# Altium PCB EP3C25.PcbDoc (part 3 of 4)
Units mil, origin at the board's own origin, x right, y up, seen from the top; angles counter-clockwise.
Board outline 6000 x 4000 mil, 2 copper layers (Top Layer, Bottom Layer); 113 components, 182 nets, 855 pads, 215 vias.
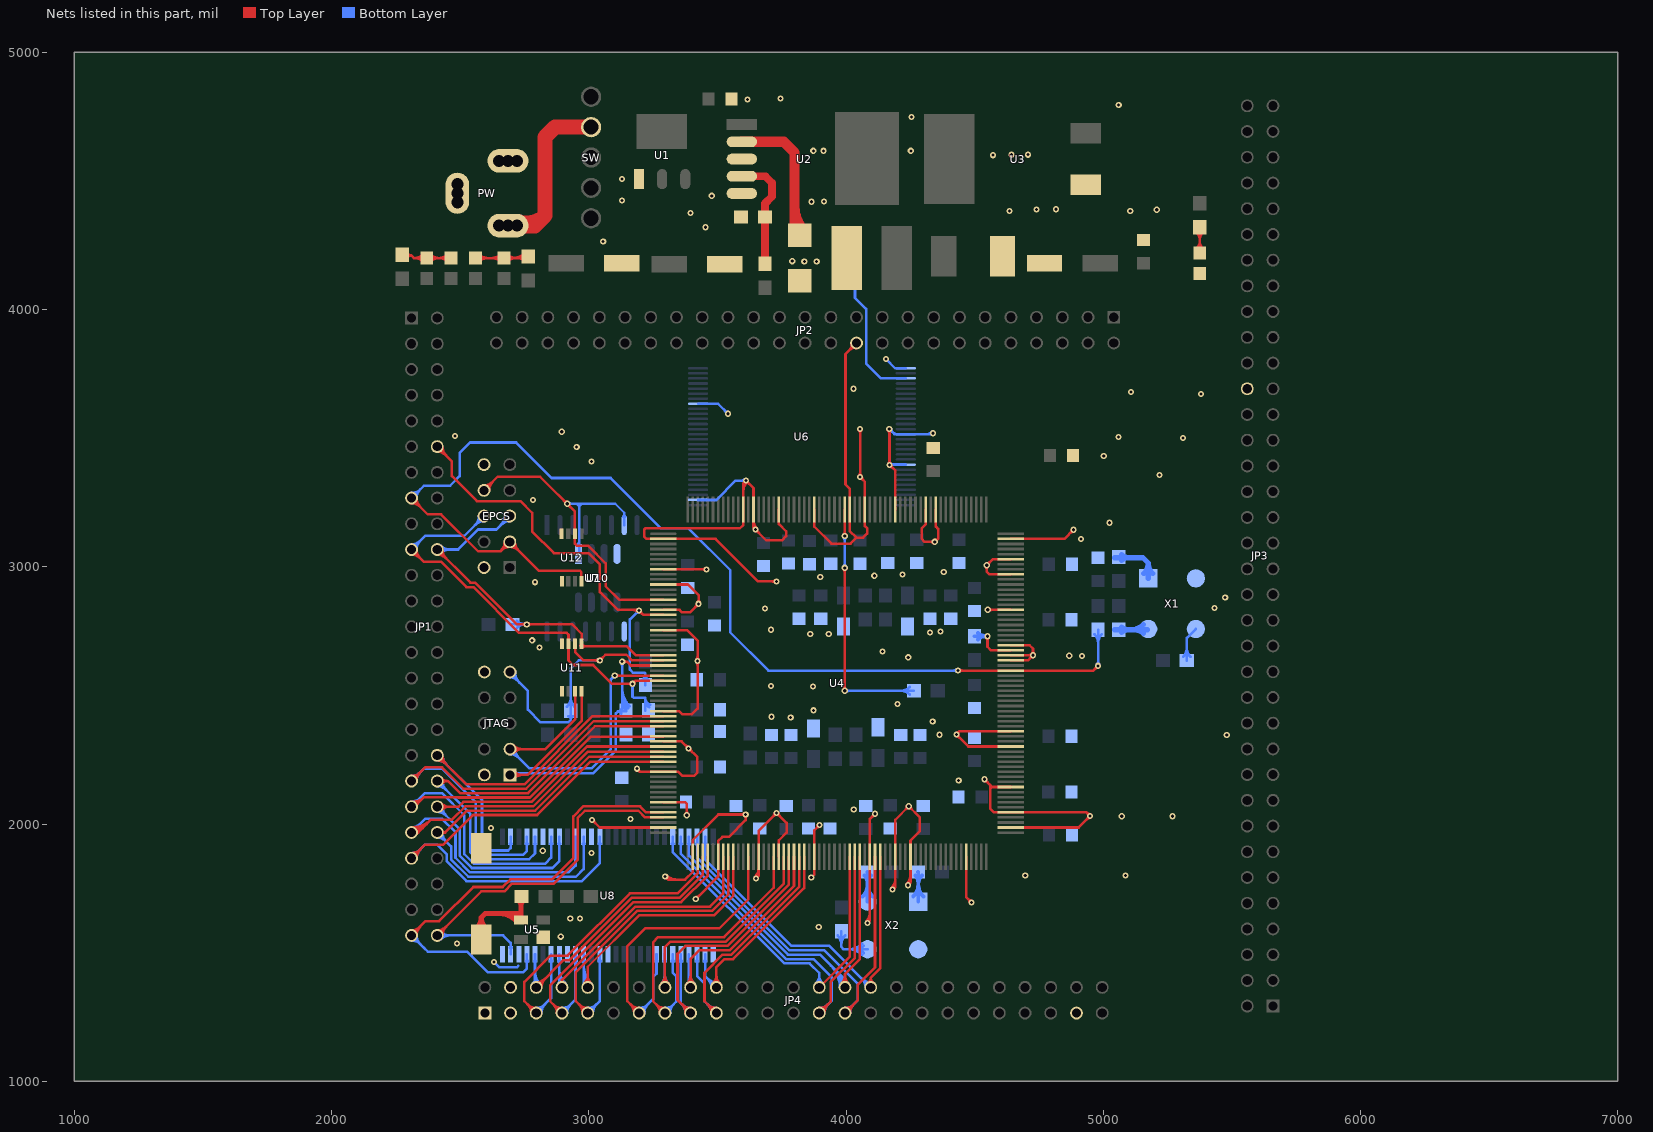
[diagram p3: the nets of this part, all layers, seen from the top]

## Via types
v1: diameter 24, hole 12, Top Layer to Bottom Layer, 205 vias
v2: diameter 40, hole 20, Top Layer to Bottom Layer, 6 vias
v3: diameter 250, hole 130, Top Layer to Bottom Layer, 3 vias
v4: diameter 250, hole 150, Top Layer to Bottom Layer, 1 vias

## Nets (pads, with @x,y where several pads share a name; then routed paths per layer and width w, separated by ;. In a path a pad name is that pad's centre, name@x,y a point inside that pad or via, vN(x,y) a via of type N, cw(c..) or ccw(c..) an arc to the next point about the centre after c; other vN are vias at no path point) (continued)
GND: C1.1 C2.1 C3.2 C4.2 C5.2 C6.2 C7.1 C8.1 C9.1 C10.1 C11.1 C12.1 C13.1 C14.1 C15.1 C16.1 C17.1 C18.1 C19.1 C20.1 C21.1 C22.1 C23.1 C24.1 C25.1 C26.1 C27.1 C28.1 C29.2 C30.2 C31.1 C32.1 C33.1 C34.1 C35.1 C36.1 C37.1 C38.1 C39.1 C40.2 C41.2 C42.1 C43.1 C44.1 C45.1 C46.1 C47.1 C48.1 C49.1 C50.1 C51.1 C52.1 C53.1 C54.1 C55.1 D5.1 EPCS.2 EPCS.10 JP2.22 JP3.50 JP4.1 JP4.3 JP4.4 JP4.47 JTAG.2 JTAG.10 PW.2 PW.3 PWLED.2 R2.1 R8.1 R19.1 R20.1 RESET.1 U1.1 U2.3 U2.5 U3.1 U4.2 U4.8 U4.11 U4.16 U4.20 U4.36 U4.42 U4.48 U4.54 U4.59 U4.62 U4.67 U4.75 U4.79 U4.86 U4.97 U4.102 U4.105 U4.116 U4.122 U4.125 U4.130 U4.138 U4.141 U4.155 U4.156 U4.158 U4.165 U4.172 U4.175 U4.179 U4.191 U4.193 U4.199 U4.205 U4.208 U4.215 U4.222 U4.227 U4.229 U5.1 U6.2 U6.21 U6.29 U6.42 U6.48 U7.10 U8.6 U8.12 U8.28 U8.41 U8.46 U8.52 U8.54 U10.4 U11.1 U11.8 U12.1 U12.8 X1.2 X2.2 | length 13659.4
  Top Layer w10: v1@3013,2009 cw(c3013,1992.1) 3024.95,2004.05 cw(c3036.9,2016) v1@3020,2016 ; v1(3013,2016) 3042.73,1986.27 U4.59@3290,1986.27 ; v1@3187,2208 cw(c3187,2191.1) 3198.95,2203.05 cw(c3210.9,2215) v1@3194,2215 ; v1(3187,2215) 3199.19,2202.81 U4.48@3290,2202.81 3348.19,2202.81 3364,2187 3409,2187 3422,2200 3422,2260 v1(3388,2294) 3361.08,2320.92 U4.42@3290,2320.92 ; U4.54@3290,2084.7 3374.3,2084.7 3381,2078 v1(3381,2034) ; U4.36@3290,2439.03 3350.97,2439.03 3364,2426 3400,2426 3423,2449 v1(3423,2634) 3423,2713 3382.01,2753.99 U4.20@3290,2753.99 ; U4.16@3290,2832.73 3353.27,2832.73 3363,2823 3394,2823 v1(3427,2856) 3427,2890 3385.85,2931.15 U4.11@3290,2931.15 ; U4.8@3290,2990.21 3457.79,2990.21 v1(3458,2990) ; v1@3294.88,1793.88 ccw(c3318.73,1817.73) 3318.73,1784 ; v1(3297,1796) 3309,1784 3374.88,1784 3404.17,1813.3 U4.62@3404.17,1872.1 3404.17,1937.17 3504,2037 v1(3610,2037) 3610,2015 3545,1950 3519,1950 3502.6,1933.6 U4.67@3502.6,1872.1 3502.6,1795.6 v1(3416,1709) ; v1@3301.95,1800.95 ccw(c3342.87,1841.87) 3342.87,1784 ; v1@3376.05,2038.95 ccw(c3364.1,2050.9) 3381,2050.9 ccw(c3397.9,2050.9) v1@3385.95,2038.95 ; v1@3381,2294 ccw(c3364.1,2294) 3376.05,2305.95 ccw(c3388,2317.9) v1@3388,2301 ; v1@3388,2287 cw(c3388,2270.1) 3399.95,2282.05 cw(c3411.9,2294) v1@3395,2294 ; v1@3416,1716 ccw(c3416,1732.9) 3427.95,1720.95 ccw(c3439.9,1709) v1@3423,1709 ; v1@3418.05,2629.05 cw(c3406.1,2617.1) 3423,2617.1 cw(c3439.9,2617.1) v1@3427.95,2629.05 ; v1@3418.05,2638.95 ccw(c3406.1,2650.9) 3423,2650.9 ccw(c3439.9,2650.9) v1@3427.95,2638.95 ; v1@3420,2856 cw(c3403.1,2856) 3415.05,2844.05 cw(c3427,2832.1) v1@3427,2849 ; v1@3422.05,2860.95 ccw(c3410.1,2872.9) 3427,2872.9 ccw(c3443.9,2872.9) v1@3431.95,2860.95 ; 3440.6,2990.21 cw(c3440.6,2972.6) v1@3453.05,2985.05 ; 3441.6,2990.21 ccw(c3441.6,3006.4) v1@3453.05,2994.95 ; 3601.02,3294.02 cw(c3651.98,3294.02) v1@3615.95,3330.05 ; 3601.02,3318.16 cw(c3627.84,3318.16) v1@3608.88,3337.12 ; v1@3605.05,2041.95 cw(c3593.1,2053.9) 3593.1,2037 cw(c3593.1,2020.1) 3605.05,2032.05 cw(c3593.1,2020.1) 3610,2020.1 cw(c3626.9,2020.1) v1@3614.95,2032.05 ; v1@3611,3328 cw(c3611,3311.1) 3622.95,3323.05 cw(c3634.9,3335) v1@3618,3335 ; 3640.39,3155.95 ccw(c3658.71,3155.95) v1@3645.76,3143 ; U4.227@3640.39,3180.09 ccw(c3682.85,3180.09) v1@3652.83,3150.07 ; v1@3645.05,1792.95 ccw(c3608.77,1829.23) U4.75@3660.08,1829.23 ; v1@3647.88,3138.12 cw(c3647.88,3121.22) 3659.83,3133.17 cw(c3671.78,3145.12) v1@3654.88,3145.12 ; v1(3650,1788) 3660.08,1798.08 U4.75@3660.08,1872.1 3660.08,1973.08 v1(3730,2043) 3769,2004 3769,1967 3738.82,1936.82 U4.79@3738.82,1872.1 ; v1@3652.12,1785.88 ccw(c3632.91,1805.09) 3660.08,1805.09 ; v1@3723,2043 cw(c3706.1,2043) 3718.05,2031.05 cw(c3730,2019.1) 3730,2036 cw(c3730,2019.1) 3741.95,2031.05 cw(c3753.9,2043) v1@3737,2043 ; v1@3725.05,2938.05 ccw(c3713.1,2926.1) 3713.1,2943 ccw(c3713.1,2959.9) v1@3725.05,2947.95 ; v1(3730,2943) 3658,2943 3492.68,3108.32 U4.2@3290,3108.32 3223.68,3108.32 3216,3116 3216,3145 3220,3149 3587,3149 3601.02,3163.02 U4.229@3601.02,3222.49 3601.02,3325.02 v1(3611,3335) 3640.39,3305.61 U4.227@3640.39,3222.49 3640.39,3152.61 3690,3103 3751,3103 3767,3119 3767,3138 3738.82,3166.18 U4.222@3738.82,3222.49 ; v1(3865,1792) 3876.61,1803.61 U4.86@3876.61,1872.1 3876.61,1975.61 v1(3897,1996) ; U4.215@3876.61,3222.49 3876.61,3156.39 3943,3090 4018,3090 4041,3113 ; v1@3890,1996 cw(c3873.1,1996) 3885.05,1984.05 cw(c3897,1972.1) v1@3897,1989 ; JP2.22@4021.37,3866.18 cw(c3996.48,3861.34) 4014.41,3843.41 ; JP2.22@4037.18,3850.37 ccw(c4032.34,3825.48) 4014.41,3843.41 ; JP2.22@4041,3870 4014.41,3843.41 ; v1@4050.05,3353.95 ccw(c4038.1,3365.9) 4055,3365.9 ccw(c4071.9,3365.9) v1@4059.95,3353.95 ; v1@4050.05,3531.05 cw(c4038.1,3519.1) 4055,3519.1 cw(c4071.9,3519.1) v1@4059.95,3531.05 ; v1@4055,3342 cw(c4055,3325.1) 4066.95,3337.05 cw(c4078.9,3349) v1@4062,3349 ; v1(4055,3536) v1(4055,3349) 4073.46,3330.54 U4.205@4073.46,3222.49 4073.46,3158.48 4082,3149.94 4082,3129 4066,3113 4041,3113 ; v1@4078.05,1619.95 ccw(c4041.6,1656.4) 4093.15,1656.4 ; v1(4083,1615) 4093.15,1625.15 4093.15,1927 ; v1@4085.12,1612.88 ccw(c4065.74,1632.26) 4093.15,1632.26 ; U4.97@4093.15,1872.1 4093.15,1927 ; v1@4106,2040 cw(c4089.1,2040) 4101.05,2028.05 cw(c4113,2016.1) v1@4113,2033 ; v1(4113,2040) 4093.15,2020.15 4093.15,1927 ; v1@4164.05,3400.95 ccw(c4152.1,3412.9) 4169,3412.9 ccw(c4185.9,3412.9) v1@4173.95,3400.95 ; v1(4168,3536) 4169,3535 v1(4169,3396) 4191.57,3373.43 U4.199@4191.57,3222.49 ; v1@4169,3389 cw(c4169,3372.1) 4180.95,3384.05 cw(c4192.9,3396) v1@4176,3396 ; v1@4176.05,1749.95 ccw(c4138.57,1787.43) 4191.57,1787.43 ; v1(4181,1745) 4191.57,1755.57 U4.102@4191.57,1872.1 4191.57,2016.57 v1(4244,2069) 4286,2027 4286,1971 4250.63,1935.63 U4.105@4250.63,1872.1 4250.63,1774.63 ; v1@4183.12,1742.88 ccw(c4162.71,1763.29) 4191.57,1763.29 ; v1@4236.05,1766.95 ccw(c4200.86,1802.14) 4250.63,1802.14 ; v1@4237,2069 cw(c4220.1,2069) 4232.05,2057.05 cw(c4244,2045.1) 4244,2062 cw(c4244,2045.1) 4255.95,2057.05 cw(c4267.9,2069) v1@4251,2069 ; v1(4241,1762) 4241,1765 4250.63,1774.63 ; v1@4243.12,1759.88 ccw(c4225,1778) 4250.63,1778 ; v1@4247.76,1763.83 cw(c4258.5,1766.75) 4250.63,1774.63 ; U4.193@4309.68,3222.49 4309.68,3164.68 4294,3149 4294,3109 4306,3097 v1(4345,3097) ; v1@4340.05,3092.05 ccw(c4328.1,3080.1) 4328.1,3097 ccw(c4328.1,3113.9) v1@4340.05,3101.95 ; v1@4345.26,3104 ccw(c4345.89,3121.11) 4358,3109 ; U4.191@4349.05,3222.49 4349.05,3155.95 4358,3147 4358,3109 ; v1@4352,3097 cw(c4366.49,3097) 4356.24,3107.24 ; v1@4353,3104 4358,3109 ; v1@4429,2341 cw(c4429,2324.1) 4440.95,2336.05 cw(c4452.9,2348) 4436,2348 cw(c4452.9,2348) 4440.95,2359.95 cw(c4429,2371.9) v1@4429,2355 ; U4.116@4467.16,1872.1 4467.16,1715.84 v1(4488,1695) ; v1@4481,1695 ccw(c4464.1,1695) 4476.05,1706.95 ccw(c4488,1718.9) v1@4488,1702 ; v1@4538,2167 cw(c4538,2150.1) 4549.95,2162.05 cw(c4561.9,2174) v1@4545,2174 ; v1(4538,2174) 4560,2152 ; v1@4542.05,3001.05 cw(c4530.1,2989.1) 4547,2989.1 cw(c4563.9,2989.1) v1@4551.95,3001.05 ; v1@4547,3013 ccw(c4547,3029.9) 4558.95,3017.95 ccw(c4570.9,3006) v1@4554,3006 ; v1(4551,2833) 4551.27,2832.73 U4.165@4640.39,2832.73 ; v1@4555.95,2828.05 cw(c4567.24,2816.76) 4567.24,2832.73 ; v1@4555.95,2837.95 ccw(c4568.56,2850.56) 4568.56,2832.73 ; 4560,2124 4560,2135.5 4568.25,2143.75 ; U4.122@4640.39,1986.27 4904.27,1986.27 v1(4949,2031) 4934.67,2045.33 U4.125@4640.39,2045.33 4575.67,2045.33 4560,2061 4560,2152 ; U4.130@4640.39,2143.75 4568.25,2143.75 ; U4.138@4640.39,2301.23 4475.77,2301.23 v1(4429,2348) 4441.29,2360.29 U4.141@4640.39,2360.29 ; U4.155@4640.39,2635.88 4706.88,2635.88 v1(4727,2656) ; U4.156@4640.39,2655.56 4726.56,2655.56 v1(4727,2656) ; U4.158@4640.39,2694.93 4714.07,2694.93 4727,2682 v1(4727,2656) ; U4.172@4640.39,2970.52 4558.48,2970.52 4547,2982 v1(4547,3006) 4570.58,3029.58 U4.175@4640.39,3029.58 ; U4.179@4640.39,3108.32 4849.32,3108.32 v1(4885,3144) ; 4709.04,2655.56 ccw(c4709.04,2673.96) 4722.05,2660.95 ccw(c4710.1,2672.9) 4727,2672.9 ccw(c4743.9,2672.9) v1@4731.95,2660.95 ; 4711.16,2655.56 cw(c4711.16,2640.16) v1@4722.05,2651.05 ; v1@4720,2656 cw(c4703.1,2656) 4715.05,2644.05 cw(c4727,2632.1) v1@4727,2649 ; v1@4878,3144 cw(c4861.1,3144) 4873.05,3132.05 cw(c4885,3120.1) v1@4885,3137 ; v1@4949,2024 ccw(c4949,2007.1) 4937.05,2019.05 ccw(c4925.1,2031) 4942,2031 ccw(c4925.1,2031) 4937.05,2042.95 ccw(c4949,2054.9) v1@4949,2038 ; 4014.41,3843.41 3998,3827 3998,3320.41 4014.41,3304 U4.208@4014.41,3222.49 4014.41,3139.59 4041,3113 ; 4560,2152 4568.25,2143.75 ; v1@4163.05,3531.05 cw(c4148.69,3516.69) 4169,3516.69 ccw(c4148.69,3516.69) v1@4163.05,3531.05 ; 4169,3521.51 cw(c4182.49,3521.51) 4172.95,3531.05 ccw(c4182.49,3521.51) 4169,3521.51
  Bottom Layer w10: v1(2632,1464) 2653,1443 2720.34,1443 2726.34,1449 ; U6.2@3425,3259.69 3495.69,3259.69 3571,3335 v1(3611,3335) ; U6.21@3425,3633.7 3502.3,3633.7 v1(3541,3595) ; v1@3534,3595 ccw(c3517.1,3595) 3529.05,3606.95 ccw(c3541,3618.9) v1@3541,3602 ; v1@3606.05,3330.05 ccw(c3594.1,3318.1) 3594.1,3335 ccw(c3594.1,3351.9) v1@3606.05,3339.95 ; v1(4155,3808) 4191.5,3771.5 U6.29@4232.4,3771.5 ; v1(4168,3536) 4188.41,3515.59 U6.42@4232.4,3515.59 4334.59,3515.59 v1(4338,3519) ; v1(4169,3396) 4170.48,3397.48 U6.48@4232.4,3397.48 ; v1@4173.95,3391.05 cw(c4189.47,3375.53) 4189.47,3397.48 ; v1@4173.95,3400.95 ccw(c4182.33,3409.33) 4182.33,3397.48 ; 4181.8,3522.2 ccw(c4197.95,3538.36) U6.42@4197.95,3515.51 ; 4312.87,3515.59 ccw(c4312.87,3544.13) v1@4333.05,3523.95 ; 4179.95,3524.05 ccw(c4168,3512.1) 4168,3529 cw(c4168,3512.1) 4179.95,3524.05 ; 4179.95,3524.05 cw(c4191.9,3536) 4175,3536 ccw(c4191.9,3536) 4179.95,3524.05
  other v1: 2488,1536 2891,1562 3894,1600 2928,1633 2966,1633 4697,1800 5086,1800 3011,1887 2821,1896 2620,1985 3162,2019 5072,2030 5269,2030 4030,2056 4438,2169 5480,2346 4363,2347 4337,2398 3785,2414 3711,2417 3874,2442 4200,2467 3872,2535 3709,2536 4242,2648 4917,2653 4868,2654 4142,2671 2808,2686 2780,2714 3861,2738 3933,2738 4326,2745 4367,2748 3708,2755 3685,2838 5432,2840 5474,2880 2791,2940 3900,2960 4110,2965 4220,2970 4380,2980 4914,3108 3647.88,3145.12 5024,3171 2783,3260 5219,3357 3011,3409 5002,3430 2953,3466 5310,3500 5059,3504 2480,3508 2895,3525 4168,3536 5380,3672 5108,3680 4029,3692 3838,4187 3886,4187 3791,4188 3056,4265 3454,4320 3395,4375 4636,4383 5105,4383 5208,4388 4740,4389 4816,4390 3866,4419 3915,4420 3129,4424 3478,4442 3129,4508 4572,4600 4643,4602 4708,4602 3873,4617 3913,4617 4252,4617 4254,4749 5060,4795 3617,4816 3745,4821
NCE: EPCS.6 JP1.19 R20.2 U4.30 U11.7 | length 2117.3
  Top Layer w10: JP1.19@2311,3047 cw(c2311,2998.72) 2345.14,3032.86 cw(c2379.28,3067) JP1.19@2331,3067 ; JP1.19@2311,3067 2358,3020 2425,3020 2524,2921 2551.12,2921 2729.12,2743 2914,2743 2921.2,2735.8 U11.7@2921.2,2699.87 2921.2,2635.8 2939,2618 3017.35,2618 3090.35,2545 v1(3170,2545) 3182.14,2557.14 U4.30@3290,2557.14 ; v1@3165.05,2540.05 ccw(c3153.1,2528.1) 3153.1,2545 ccw(c3153.1,2561.9) v1@3165.05,2549.95 ; v1@3170,2552 ccw(c3170,2568.9) 3181.95,2556.95 ccw(c3193.9,2545) v1@3177,2545
  Bottom Layer w10: JP1.19@2311,3067 2364,3120 2516,3120 EPCS.6@2593,3197 ; JP1.19@2311,3087 ccw(c2311,3135.28) 2345.14,3101.14 ccw(c2379.28,3067) JP1.19@2331,3067 ; EPCS.6@2573,3197 cw(c2524.72,3197) 2558.86,3162.86 cw(c2593,3128.72) EPCS.6@2593,3177 ; v1@3165.05,2540.05 cw(c3153.1,2528.1) 3170,2528.1 cw(c3186.9,2528.1) v1@3174.95,2540.05 ; v1(3170,2545) 3170,2495 3175,2490 3220,2490 ; R20.2@3220,2440 3220,2490 ; 3220,2475.87 ccw(c3243.24,2475.87) R20.2@3235.52,2453.96 ; R20.2@3238.84,2463.39 cw(c3248.21,2490) 3220,2490
NCONF_DONE: EPCS.3 JP1.15 R11.1 U4.153 U12.4 | length 4798.4
  Top Layer w10: JP1.15@2311,3247 cw(c2311,3198.72) 2345.14,3232.86 cw(c2379.28,3267) JP1.15@2331,3267 ; JP1.15@2311,3267 2374,3204 2426.33,3204 2570.33,3060 2656,3060 EPCS.3@2693,3097 2805.36,2984.64 2965.36,2984.64 2971.39,2978.61 U12.4@2971.39,2946.13 ; EPCS.3@2673,3097 cw(c2624.72,3097) 2658.86,3062.86 cw(c2693,3028.72) 2693,3077 cw(c2693,3028.72) 2727.14,3062.86 cw(c2761.28,3097) EPCS.3@2713,3097 ; v1(4435,2596.51) U4.153@4640.39,2596.51 4961.51,2596.51 v1(4980,2615) ; v1@4439.95,2591.56 cw(c4451.9,2579.61) 4451.9,2596.51 cw(c4451.9,2613.41) v1@4439.95,2601.46 ; v1@4973,2615 cw(c4956.1,2615) 4968.05,2603.05 cw(c4980,2591.1) v1@4980,2608
  Bottom Layer w10: JP1.15@2311,3267 2359,3315 2461,3315 2498,3352 2498,3442 2539,3483 2718,3483 2856,3345 3085,3345 3281,3149 3387.94,3149 3550,2986.94 3550,2745 3698.49,2596.51 v1(4435,2596.51) ; JP1.15@2311,3287 ccw(c2311,3335.28) 2345.14,3301.14 ccw(c2379.28,3267) JP1.15@2331,3267 ; v1@4430.05,2591.56 ccw(c4418.1,2579.61) 4418.1,2596.51 ccw(c4418.1,2613.41) v1@4430.05,2601.46 ; R11.1@4965.44,2738.47 cw(c4930.29,2703.32) 4980,2703.32 cw(c5029.71,2703.32) R11.1@4994.56,2738.47 ; v1@4975.05,2619.95 ccw(c4963.1,2631.9) 4980,2631.9 ccw(c4996.9,2631.9) v1@4984.95,2619.95 ; v1(4980,2615) R11.1@4980,2755
NCONFIG: EPCS.5 JP1.20 R13.1 U4.25 U11.5 | length 1888.5
  Top Layer w10: JP1.20@2411,3047 cw(c2411,2998.72) 2445.14,3032.86 cw(c2479.28,3067) JP1.20@2431,3067 ; JP1.20@2411,3067 2540,2938 2558.17,2938 2720.17,2776 2936,2776 2972.39,2739.61 U11.5@2972.39,2699.87 2980.76,2691.5 ; v1@2754.05,2771.05 ccw(c2742.1,2759.1) 2742.1,2776 ccw(c2742.1,2792.9) v1@2754.05,2780.95 ; v1@2763.95,2771.05 cw(c2775.9,2759.1) 2775.9,2776 cw(c2775.9,2792.9) v1@2763.95,2780.95 ; U11.5@2967.36,2692.29 cw(c2973.67,2685.95) U11.5@2979.99,2692.27 ; U11.5@2974.42,2685.2 cw(c2989.62,2670) 2989.62,2691.5 ; U11.5@2975.22,2686.78 cw(c2980.76,2685.89) 2980.76,2691.5 ; U4.25@3290,2655.56 3183.13,2655.56 3147.19,2691.5 2980.76,2691.5
  Bottom Layer w10: JP1.20@2411,3067 2492,3067 2570,3145 2641,3145 EPCS.5@2693,3197 ; JP1.20@2425.14,3052.86 cw(c2459.28,3018.72) 2459.28,3067 cw(c2459.28,3115.28) JP1.20@2425.14,3081.14 ; EPCS.5@2673,3197 cw(c2624.72,3197) 2658.86,3162.86 cw(c2693,3128.72) EPCS.5@2693,3177 ; R13.1@2703.17,2776 v1(2759,2776) ; R13.1@2719.69,2761.44 cw(c2754.84,2726.29) 2754.84,2776 cw(c2754.84,2825.71) R13.1@2719.69,2790.56 ; v1@2754.05,2771.05 ccw(c2742.1,2759.1) 2742.1,2776 ccw(c2742.1,2792.9) v1@2754.05,2780.95
NCS: EPCS.8 U4.14 U7.7 U10.1 U12.6 | length 1765.2
  Top Layer w10: EPCS.8@2593,3297 2646,3350 2811,3350 2945.8,3215.2 U12.6@2945.8,3127.51 2945.8,3090.2 2955,3081 2998.51,3081 3066,3013.51 3066,2924.1 3118,2872.1 U4.14@3290,2872.1 ; EPCS.8@2593,3317 ccw(c2593,3365.28) 2627.14,3331.14 ccw(c2661.28,3297) EPCS.8@2613,3297 ; 2903.8,3257.2 ccw(c2916.35,3269.74) v1@2916.35,3252 ; 2904.65,3256.35 cw(c2893.3,3245) v1@2909.35,3245 ; v1@2916.35,3238 cw(c2916.35,3221.95) 2927.7,3233.3 ; v1@2923.35,3245 ccw(c2941.1,3245) 2928.55,3232.45
  Bottom Layer w10: v1(2916.35,3245) 3103,3245 3138,3210 U7.7@3138,3162 ; v1@2921.3,3240.05 cw(c2933.25,3228.1) 2933.25,3245 cw(c2933.25,3261.9) v1@2921.3,3249.95 ; 2953,3245 2963,3235 ; U10.1@2953.63,3081.27 ccw(c2931.02,3103.88) 2963,3103.88 ; U10.1@2959,3050.84 U10.1@2959.84,3050 ; U10.1@2961,3051.16 U10.1@2959.84,3050 ; U10.1@2963,3088.63 ccw(c2973.42,3088.63) U10.1@2966.05,3081.27 ; 2963,3245 2963,3233 ; 2973,3245 2963,3235 ; U7.7@3134.58,3194.95 ccw(c3126.31,3203.22) 3138,3203.22 ccw(c3149.69,3203.22) U7.7@3141.42,3194.95 ; U10.1@2959.84,3050 2963,3053.16 2963,3233 ; 2963,3233 2963,3235 ; 2963,3233 2963,3235
NetD0_1: D0.1 D1.1 R4.2 | length 541.5
  Top Layer w10: D1.1@2560,4200 R4.2@2765,4200 ; D1.1@2574.14,4185.86 cw(c2608.28,4151.72) 2608.28,4200 cw(c2608.28,4248.28) D1.1@2574.14,4214.14 ; D0.1@2655.86,4185.86 ccw(c2621.72,4151.72) 2621.72,4200 ccw(c2621.72,4248.28) D0.1@2655.86,4214.14 ; D0.1@2684.14,4185.86 cw(c2718.28,4151.72) 2718.28,4200 cw(c2718.28,4248.28) D0.1@2684.14,4214.14 ; 2705.56,4200 ccw(c2705.56,4263.47) R4.2@2750.44,4218.59 ; 2725.02,4200 cw(c2725.02,4164.05) R4.2@2750.44,4189.47 ; 2729.7,4200 ccw(c2729.7,4239.33) R4.2@2757.51,4211.52
NetD2_1: D2.1 D3.1 R3.2 | length 463.1
  Top Layer w10: R3.2@2275,4210 2310,4210 ; R3.2@2292.54,4200.24 cw(c2310,4189.5) 2310,4210 ; R3.2@2293.41,4220.25 ccw(c2310,4228.55) 2310,4210 ; D3.1@2355.86,4185.86 ccw(c2321.72,4151.72) 2321.72,4200 ccw(c2321.72,4248.28) D3.1@2355.86,4214.14 ; D3.1@2384.14,4185.86 cw(c2418.28,4151.72) 2418.28,4200 cw(c2418.28,4248.28) D3.1@2384.14,4214.14 ; D2.1@2450.86,4185.86 ccw(c2416.72,4151.72) 2416.72,4200 ccw(c2416.72,4248.28) D2.1@2450.86,4214.14 ; D2.1@2465,4200 D3.1@2370,4200 2320,4200 2310,4210
NetD5_2: D5.2 L1.1 U2.2 | length 644
  Top Layer w40: U2.2@3595,4652.07 3757.93,4652.07 3800,4610 D5.2@3800,4290 ; 3800,4397.89 ccw(c3929.3,4397.89) D5.2@3837.87,4306.46
NetL4_1: L4.1 X1.4 | length 286.9
  Bottom Layer w10: X1.4@5171.85,2755 X1.4@5175,2758.15
  Bottom Layer w20: L4.1@5045,2755 X1.4@5171.85,2755 ; L4.1@5071.02,2743.98 cw(c5097.64,2717.36) 5097.64,2755 cw(c5097.64,2792.64) L4.1@5071.02,2766.02 ; 5105.99,2755 ccw(c5105.99,2827.16) X1.4@5157.02,2776.13 ; 5121.2,2755 cw(c5121.2,2704.35) X1.4@5157.02,2740.17
NetL7_1: L7.1 X2.4 | length 289.6
  Bottom Layer w15: X2.4@4064.4,1717.75 ccw(c4016.71,1765.44) 4084.15,1765.44 ccw(c4151.59,1765.44) X2.4@4103.9,1717.75 ; L7.1@4071.21,1800.21 cw(c4039.96,1768.96) 4084.15,1768.96 ; L7.1@4084,1813 4084.15,1812.85 X2.4@4084.15,1698 ; 4084.15,1769.69 cw(c4127.31,1769.69) L7.1@4096.79,1800.21
NetPW_1: PW.1 SW.1 | length 773.3
  Top Layer w59.06: PW.1@2686,4326 PW.1@2721,4326 2791,4326 2830,4365 ; PW.1@2725.54,4341.51 ccw(c2759.22,4435.78) 2830,4365 ; SW.1@3009,4709.11 2869.11,4709.11 2830,4670 2830,4365
NetPWLED_1: PWLED.1 R1.1 | length 253.9
  Top Layer w10: R1.1@5360.44,4303.47 cw(c5325.29,4268.32) 5375,4268.32 ; PWLED.1@5360.86,4234.14 ccw(c5326.72,4268.28) 5375,4268.28 ; PWLED.1@5375,4220 R1.1@5375,4320 ; PWLED.1@5389.14,4234.14 cw(c5423.28,4268.28) 5375,4268.28 ; R1.1@5389.56,4303.47 ccw(c5424.71,4268.32) 5375,4268.32
NetR2_2: R2.2 R5.2 U2.4 | length 456.6
  Top Layer w30: U2.4@3595,4518.21 3686.79,4518.21 3712,4493 3712,4439 3685,4412 R2.2@3685,4360 R5.2@3685,4175
NetR6_2: R6.2 RESET.2 U5.3 | length 675.1
  Top Layer w20: RESET.2@2562.26,1592.43 ccw(c2521.83,1637) 2582,1637 ; RESET.2@2582,1551 2582,1637 ; RESET.2@2601.74,1592.43 cw(c2642.17,1637) 2582,1637 ; 2646.43,1652.4 cw(c2646.43,1545) U5.3@2722.38,1620.95 ; 2694.72,1652.4 cw(c2694.72,1593.29) U5.3@2736.52,1635.09 ; R6.2@2726.01,1706.98 cw(c2700.21,1681.18) 2736.69,1681.18 ; 2736.69,1679.54 cw(c2775.49,1679.54) R6.2@2748.06,1706.98 ; R6.2@2736.69,1731.69 2736.69,1652.4 2597.4,1652.4 2582,1637 ; 2736.69,1645.03 ccw(c2755.32,1645.03) 2742.15,1631.86 cw(c2755.32,1645.03) 2736.69,1645.03 ; 2736.69,1645.03 cw(c2718.06,1645.03) 2731.24,1631.86 ccw(c2718.06,1645.03) 2736.69,1645.03
NetR8_2: R8.2 U6.31 | length 608.7
  Bottom Layer w10: R8.2@4020.44,4105.47 cw(c3985.29,4070.32) 4035,4070.32 cw(c4084.71,4070.32) R8.2@4049.56,4105.47 ; R8.2@4035,4125 4035,4045 4078,4002 4078,3790.96 4136.83,3732.13 U6.31@4232.4,3732.13
NetR9_2: R9.2 X1.1 | length 350.5
  Bottom Layer w20: R9.2@5045,3035 5155,3035 5175,3015 ; R9.2@5071.02,3025.01 cw(c5095.15,3000.88) 5095.15,3035 ; R9.2@5071.02,3047.06 ccw(c5100.13,3076.16) 5100.13,3035 ; X1.1@5157.32,2973.28 ccw(c5116.95,3015) 5175,3015 ; X1.1@5175,2955 5175,3015 ; X1.1@5192.68,2973.28 cw(c5233.05,3015) 5175,3015
NetR10_2: R10.2 U4.157 | length 282.4
  Top Layer w10: v1@4545.05,2725.05 cw(c4533.1,2713.1) 4550,2713.1 cw(c4566.9,2713.1) v1@4554.95,2725.05 ; v1(4550,2730) 4550,2689 4564,2675 4640.15,2675 U4.157@4640.39,2675.25
  Bottom Layer w15: R10.2@4500,2730 v1(4550,2730) ; R10.2@4512.79,2717.21 cw(c4543.67,2686.33) 4543.67,2730 cw(c4543.67,2773.67) R10.2@4512.79,2742.79
NetR14_1: R14.1 U4.209 | length 1211
  Top Layer w10: v1@3990.05,2522.95 ccw(c3978.1,2534.9) 3995,2534.9 ccw(c4011.9,2534.9) v1@3999.95,2522.95 ; v1@3990.05,2991.05 cw(c3978.1,2979.1) 3995,2979.1 cw(c4011.9,2979.1) v1@3999.95,2991.05 ; v1@3990.05,3123.95 ccw(c3978.1,3135.9) 3995,3135.9 ccw(c4011.9,3135.9) v1@3999.95,3123.95 ; U4.209@3994.72,3222.49 3995,3222.21 v1(3995,3119) ; v1(3995,2518) v1(3995,2996)
  Bottom Layer w10: v1@3990.05,3000.95 ccw(c3978.1,3012.9) 3995,3012.9 ccw(c4011.9,3012.9) v1@3999.95,3000.95 ; v1@3990.05,3114.05 cw(c3978.1,3102.1) 3995,3102.1 cw(c4011.9,3102.1) v1@3999.95,3114.05 ; v1(3995,2518) R14.1@4264,2518 ; v1(3995,2996) v1(3995,3119) ; v1@3999.95,2513.05 cw(c4011.9,2501.1) 4011.9,2518 cw(c4011.9,2534.9) v1@3999.95,2522.95 ; R14.1@4247.47,2503.44 ccw(c4212.32,2468.29) 4212.32,2518 ccw(c4212.32,2567.71) R14.1@4247.47,2532.56
NetR15_1: R15.1 X1.3 | length 215.7
  Bottom Layer w10: R15.1@5310.44,2649.56 ccw(c5275.29,2684.71) 5325,2684.71 ccw(c5374.71,2684.71) R15.1@5339.56,2649.56 ; R15.1@5325,2635 5325,2723.11 X1.3@5360.04,2758.15
NetR22_2: R22.2 X2.1 | length 289.9
  Bottom Layer w15: X2.1@4261.25,1717.75 ccw(c4213.56,1765.44) 4281,1765.44 ccw(c4348.44,1765.44) X2.1@4300.75,1717.75 ; R22.2@4269.18,1800.21 cw(c4240.63,1771.66) 4281,1771.66 ; R22.2@4280,1813 4281,1812 X2.1@4281,1698 ; 4281,1766.99 cw(c4327.98,1766.99) R22.2@4294.76,1800.21
NetR23_1: R23.1 X2.3 | length 437.9
  Bottom Layer w10: R23.1@3967.44,1566.47 cw(c3932.29,1531.32) 3982,1531.32 cw(c4031.71,1531.32) R23.1@3996.56,1566.47 ; R23.1@3982,1583 3982,1522 3991.04,1512.96 X2.3@4084.15,1512.96 ; X2.3@4062.63,1491.44 ccw(c4010.68,1439.49) 4010.68,1512.96 ccw(c4010.68,1586.43) X2.3@4062.63,1534.48 ; X2.3@4069.7,1498.51 ccw(c4034.82,1463.63) 4034.82,1512.96 ccw(c4034.82,1562.29) X2.3@4069.7,1527.41
NSTATUS: JP1.12 R12.1 U4.17 | length 1855
  Top Layer w10: JP1.12@2411,3447 cw(c2411,3398.72) 2445.14,3432.86 cw(c2479.28,3467) JP1.12@2431,3467 ; JP1.12@2411,3467 2468,3410 2468,3352 2565,3255 2735,3255 2780,3210 2780,3136.94 2864.31,3052.64 2999.49,3052.64 3043.26,3008.86 3043.26,2901.74 3112.84,2832.16 3192.84,2832.16 v1(3195,2830) 3211.96,2813.04 U4.17@3290,2813.04 ; 3172.9,2832.16 cw(c3172.9,2807.9) v1@3190.05,2825.05 ; v1@3195,2823 cw(c3195,2806.1) 3206.95,2818.05 cw(c3218.9,2830) v1@3202,2830
  Bottom Layer w10: v1@3188,2830 cw(c3171.1,2830) 3183.05,2818.05 cw(c3195,2806.1) v1@3195,2823 ; v1(3195,2830) 3160,2795 3160,2600 3172,2588 3217,2588 3220,2585 ; R12.1@3207.08,2558 ccw(c3185.33,2585) 3220,2585 ; R12.1@3220,2540 3220,2585 ; R12.1@3232.92,2558 cw(c3254.67,2585) 3220,2585
SD_A0: JP4.27 U4.94 U8.23 | length 1845.5
  Top Layer w10: JP4.27@3896,1265 3940,1309 3940,1384.96 4034.09,1479.05 U4.94@4034.09,1872.1 ; JP4.27@3896,1285 ccw(c3896,1333.28) 3930.14,1299.14 ccw(c3964.28,1265) JP4.27@3916,1265
  Bottom Layer w10: U8.23@3354.49,1924.03 cw(c3346.22,1915.76) 3357.91,1915.76 cw(c3369.6,1915.76) U8.23@3361.34,1924.03 ; U8.23@3357.91,1950.11 3357.91,1884.21 3767.12,1475 3874,1475 3945,1404 3945,1314 JP4.27@3896,1265 ; JP4.27@3896,1285 ccw(c3896,1333.28) 3930.14,1299.14 ccw(c3964.28,1265) JP4.27@3916,1265
SD_A1: JP4.30 U4.95 U8.24 | length 1829.6
  Top Layer w10: JP4.30@3981.86,1379.14 ccw(c3947.72,1413.28) 3996,1413.28 ccw(c4044.28,1413.28) JP4.30@4010.14,1379.14 ; JP4.30@3996,1365 3996,1416.92 4053.78,1474.69 U4.95@4053.78,1872.1
  Bottom Layer w10: U8.24@3385.99,1924.03 cw(c3377.72,1915.76) 3389.41,1915.76 cw(c3401.1,1915.76) U8.24@3392.83,1924.03 ; U8.24@3389.41,1950.11 3389.41,1876.76 3774.17,1492 3899,1492 3996,1395 ; 3940.64,1450.36 cw(c3855.29,1365) JP4.30@3976,1365 ; 3957.72,1433.28 cw(c3889.43,1365) JP4.30@3986,1365 ; 3974.79,1416.21 cw(c3923.57,1365) JP4.30@3996,1365 3996,1395 ; JP4.30@3988.31,1383.46 ccw(c3983.5,1395) 3996,1395 ; 3991.86,1399.14 cw(c3957.72,1365) JP4.30@4006,1365 ; JP4.30@4003.69,1383.46 cw(c4008.5,1395) 3996,1395
SD_A2: JP4.29 U4.98 U8.25 | length 1868.4
  Top Layer w10: JP4.29@3996,1265 4045,1314 4045,1375 4112.83,1442.83 U4.98@4112.83,1872.1 ; JP4.29@3996,1285 ccw(c3996,1333.28) 4030.14,1299.14 ccw(c4064.28,1265) JP4.29@4016,1265
  Bottom Layer w10: U8.25@3417.48,1924.03 cw(c3409.22,1915.76) 3420.91,1915.76 cw(c3432.6,1915.76) U8.25@3424.33,1924.03 ; U8.25@3420.91,1950.11 3420.91,1869.3 3781.21,1509 3915.96,1509 4045,1379.96 4045,1314 JP4.29@3996,1265 ; JP4.29@3996,1285 ccw(c3996,1333.28) 4030.14,1299.14 ccw(c4064.28,1265) JP4.29@4016,1265
SD_A3: JP4.32 U4.99 U8.26 | length 1602
  Top Layer w10: JP4.32@4085.06,1381.74 ccw(c4071.85,1401.96) 4096,1401.96 ; JP4.32@4096,1365 4096,1401.96 ; JP4.32@4106.94,1381.74 cw(c4120.15,1401.96) 4096,1401.96 ; U4.99@4132.52,1872.1 4132.52,1438.48 4096,1401.96
  Bottom Layer w10: U8.26@3448.98,1924.03 cw(c3440.71,1915.76) 3452.4,1915.76 cw(c3464.09,1915.76) U8.26@3455.83,1924.03 ; U8.26@3452.4,1950.11 3452.4,1861.85 3788.25,1526 3935,1526 JP4.32@4096,1365 ; JP4.32@4076,1365 ccw(c4027.72,1365) 4061.86,1399.14 ccw(c4096,1433.28) JP4.32@4096,1385
SD_A4: JP4.20 U4.84 U8.29 | length 984.7
  Top Layer w10: JP4.20@3481.86,1379.14 ccw(c3447.72,1413.28) 3496,1413.28 ccw(c3544.28,1413.28) JP4.20@3510.14,1379.14 ; JP4.20@3496,1365 3496,1443.5 3527.5,1475 3561.25,1475 3837.24,1750.99 U4.84@3837.24,1872.1
  Bottom Layer w10: U8.29@3448.98,1467.34 cw(c3440.71,1459.07) 3452.4,1459.07 cw(c3464.09,1459.07) U8.29@3455.83,1467.34 ; U8.29@3452.4,1493.42 3452.4,1408.6 JP4.20@3496,1365 ; JP4.20@3476,1365 ccw(c3427.72,1365) 3461.86,1399.14 ccw(c3496,1433.28) JP4.20@3496,1385
SD_A5: JP4.19 U4.83 U8.30 | length 1227.7
  Top Layer w10: JP4.19@3476,1265 ccw(c3427.72,1265) 3461.86,1299.14 ccw(c3496,1333.28) JP4.19@3496,1285 ; JP4.19@3496,1265 3450,1311 3450,1421.54 3520.46,1492 3554.21,1492 3817.56,1755.35 U4.83@3817.56,1872.1
  Bottom Layer w10: U8.30@3417.48,1467.34 cw(c3407.39,1457.24) 3421.66,1457.24 ; U8.30@3420.91,1493.42 3421.66,1492.66 3421.66,1408.34 3450,1380 3450,1311 JP4.19@3496,1265 ; 3421.66,1460.9 cw(c3430.77,1460.9) U8.30@3424.33,1467.34 ; JP4.19@3476,1265 ccw(c3427.72,1265) 3461.86,1299.14 ccw(c3496,1333.28) JP4.19@3496,1285
SD_A6: JP4.18 U4.82 U8.31 | length 1080.6
  Top Layer w10: JP4.18@3381.86,1379.14 ccw(c3347.72,1413.28) 3396,1413.28 ccw(c3444.28,1413.28) JP4.18@3410.14,1379.14 ; JP4.18@3396,1365 3396,1476 3429,1509 3547.17,1509 3797.87,1759.71 U4.82@3797.87,1872.1
  Bottom Layer w10: JP4.18@3381.86,1379.14 ccw(c3363.63,1397.37) 3389.41,1397.37 ; U8.31@3385.99,1467.34 cw(c3377.72,1459.07) 3389.41,1459.07 cw(c3401.1,1459.07) U8.31@3392.83,1467.34 ; 3389.41,1405.05 ccw(c3436.05,1405.05) JP4.18@3403.07,1372.07 ; 3389.41,1429.19 ccw(c3460.19,1429.19) JP4.18@3410.14,1379.14 ; U8.31@3389.41,1493.42 3389.41,1371.59 JP4.18@3396,1365
SD_A7: JP4.17 U4.81 U8.32 | length 1318
  Top Layer w10: JP4.17@3376,1265 ccw(c3327.72,1265) 3361.86,1299.14 ccw(c3396,1333.28) JP4.17@3396,1285 ; JP4.17@3396,1265 3345,1316 3345,1495 3376,1526 3540.12,1526 3778.19,1764.06 U4.81@3778.19,1872.1
  Bottom Layer w10: U8.32@3354.49,1467.34 cw(c3346.22,1459.07) 3357.91,1459.07 cw(c3369.6,1459.07) U8.32@3361.34,1467.34 ; U8.32@3357.91,1493.42 3357.91,1303.09 JP4.17@3396,1265 ; JP4.17@3376,1265 ccw(c3327.72,1265) 3361.86,1299.14 ccw(c3396,1333.28) JP4.17@3396,1285
SD_A8: JP4.15 U4.78 U8.33 | length 1392.8
  Top Layer w10: JP4.15@3276,1265 ccw(c3227.72,1265) 3261.86,1299.14 ccw(c3296,1333.28) JP4.15@3296,1285 ; JP4.15@3296,1265 3250,1311 3250,1540 3270,1560 3526.04,1560 3719.13,1753.09 U4.78@3719.13,1872.1
  Bottom Layer w10: JP4.15@3296,1265 3340,1309 3340,1410 3326.42,1423.58 U8.33@3326.42,1493.42 ; JP4.15@3296,1285 ccw(c3296,1333.28) 3330.14,1299.14 ccw(c3364.28,1265) JP4.15@3316,1265 ; U8.33@3322.99,1467.34 cw(c3314.73,1459.07) 3326.42,1459.07 cw(c3338.11,1459.07) U8.33@3329.84,1467.34
SD_A9: JP4.16 U4.80 U8.34 | length 1145.4
  Top Layer w10: JP4.16@3281.86,1379.14 ccw(c3247.72,1413.28) 3296,1413.28 ccw(c3344.28,1413.28) JP4.16@3310.14,1379.14 ; JP4.16@3296,1365 3296,1521 3318,1543 3533.08,1543 3758.5,1768.42 U4.80@3758.5,1872.1
  Bottom Layer w10: JP4.16@3281.86,1379.14 ccw(c3250.32,1410.68) 3294.92,1410.68 ; U8.34@3291.5,1467.34 cw(c3283.23,1459.07) 3294.92,1459.07 cw(c3306.61,1459.07) U8.34@3298.35,1467.34 ; 3294.92,1391.74 ccw(c3322.74,1391.74) JP4.16@3303.07,1372.07 ; 3294.92,1415.89 ccw(c3346.89,1415.89) JP4.16@3310.14,1379.14 ; U8.34@3294.92,1493.42 3294.92,1366.08 JP4.16@3296,1365
SD_A10: JP4.28 U4.93 U8.22 | length 1529.3
  Top Layer w10: JP4.28@3896,1365 4014.41,1483.41 U4.93@4014.41,1872.1
  Bottom Layer w10: U8.22@3322.99,1924.03 cw(c3314.73,1915.76) 3326.42,1915.76 cw(c3338.11,1915.76) U8.22@3329.84,1924.03 ; U8.22@3326.42,1950.11 3326.42,1891.67 3760.08,1458 3859,1458 3896,1421 JP4.28@3896,1365 ; JP4.28@3881.86,1379.14 ccw(c3847.72,1413.28) 3896,1413.28 ccw(c3944.28,1413.28) JP4.28@3910.14,1379.14
SD_A11: JP4.13 U4.73 U8.35 | length 1416.4
  Top Layer w10: JP4.13@3176,1265 ccw(c3127.72,1265) 3161.86,1299.14 ccw(c3196,1333.28) JP4.13@3196,1285 ; JP4.13@3196,1265 3150,1311 3150,1525 3219,1594 3507.21,1594 3620.71,1707.5 U4.73@3620.71,1872.1
  Bottom Layer w10: JP4.13@3196,1265 3250,1319 3250,1405 3263.43,1418.43 U8.35@3263.43,1493.42 ; JP4.13@3196,1285 ccw(c3196,1333.28) 3230.14,1299.14 ccw(c3264.28,1265) JP4.13@3216,1265 ; U8.35@3260,1467.34 cw(c3251.74,1459.07) 3263.43,1459.07 cw(c3275.12,1459.07) U8.35@3266.85,1467.34
SD_DQ0: JP1.36 U4.37 U8.2 | length 1802.2
  Top Layer w10: JP1.36@2411,2247 cw(c2411,2198.72) 2445.14,2232.86 cw(c2479.28,2267) JP1.36@2431,2267 ; JP1.36@2411,2267 2524,2154 2749.71,2154 3015.05,2419.34 U4.37@3290,2419.34
  Bottom Layer w10: JP1.36@2411,2247 cw(c2411,2198.72) 2445.14,2232.86 cw(c2479.28,2267) JP1.36@2431,2267 ; JP1.36@2411,2267 2585,2093 2585,1905 2593,1897 2687,1897 2696.5,1906.5 U8.2@2696.5,1950.11 ; U8.2@2693.07,1924.03 cw(c2684.81,1915.76) 2696.5,1915.76 cw(c2708.19,1915.76) U8.2@2699.92,1924.03
SD_DQ1: JP1.37 U4.38 U8.4 | length 2088.4
  Top Layer w10: JP1.37@2311,2167 2364,2220 2430,2220 2513,2137 2756.75,2137 3019.41,2399.66 U4.38@3290,2399.66 ; JP1.37@2311,2187 ccw(c2311,2235.28) 2345.14,2201.14 ccw(c2379.28,2167) JP1.37@2331,2167
  Bottom Layer w10: JP1.37@2311,2167 2359,2215 2430,2215 2560,2085 2560,1905 2585,1880 2745,1880 2759.49,1894.49 U8.4@2759.49,1950.11 ; JP1.37@2311,2187 ccw(c2311,2235.28) 2345.14,2201.14 ccw(c2379.28,2167) JP1.37@2331,2167 ; U8.4@2756.06,1924.03 cw(c2747.8,1915.76) 2759.49,1915.76 cw(c2771.18,1915.76) U8.4@2762.91,1924.03
SD_DQ2: JP1.38 U4.39 U8.5 | length 1827.2
  Top Layer w10: JP1.38@2411,2167 2453,2167 ; JP1.38@2426.53,2154.39 cw(c2453,2132.9) 2453,2167 ; JP1.38@2426.53,2179.61 ccw(c2453,2201.1) 2453,2167 ; U4.39@3290,2379.97 3023.76,2379.97 2763.79,2120 2500,2120 2453,2167
  Bottom Layer w10: JP1.38@2411,2147 cw(c2411,2098.72) 2445.14,2132.86 cw(c2479.28,2167) JP1.38@2431,2167 ; JP1.38@2411,2167 2540,2038 2540,1890 2567,1863 2768,1863 2790.98,1885.98 U8.5@2790.98,1950.11 ; U8.5@2787.56,1924.03 cw(c2779.29,1915.76) 2790.98,1915.76 cw(c2802.67,1915.76) U8.5@2794.41,1924.03
SD_DQ3: JP1.39 U4.41 U8.7 | length 2148.1
  Top Layer w10: JP1.39@2311,2067 2322,2067 2359,2104 ; JP1.39@2311.8,2076.97 ccw(c2315.06,2117.34) 2343.7,2088.7 ; JP1.39@2312.61,2086.94 ccw(c2317.34,2145.65) 2359,2104 ; JP1.39@2331,2067 cw(c2352.73,2067) 2337.36,2082.36 ; U4.41@3290,2340.6 3289.4,2340 3007.83,2340 2770.83,2103 2492,2103 2491,2104 2359,2104
  Bottom Layer w10: JP1.39@2311,2067 2364,2120 2430,2120 2516,2034 2516,1882.89 2552.89,1846 2831,1846 2853.98,1868.98 U8.7@2853.98,1950.11 ; JP1.39@2311,2087 ccw(c2311,2135.28) 2345.14,2101.14 ccw(c2379.28,2067) JP1.39@2331,2067 ; U8.7@2850.55,1924.03 cw(c2842.29,1915.76) 2853.98,1915.76 cw(c2865.67,1915.76) U8.7@2857.4,1924.03
SD_DQ4: JP1.40 U4.43 U8.8 | length 1885.2
  Top Layer w10: JP1.40@2411,2067 2493.92,2067 2512.92,2086 2777.88,2086 2993.11,2301.23 U4.43@3290,2301.23 ; JP1.40@2425.14,2052.86 cw(c2459.28,2018.72) 2459.28,2067 cw(c2459.28,2115.28) JP1.40@2425.14,2081.14
  Bottom Layer w10: JP1.40@2411,2047 cw(c2411,1998.72) 2445.14,2032.86 cw(c2479.28,2067) JP1.40@2431,2067 ; JP1.40@2411,2067 2499,1979 2499,1875.85 2545.85,1829 2859,1829 2885.47,1855.47 U8.8@2885.47,1950.11 ; U8.8@2882.05,1924.03 cw(c2873.78,1915.76) 2885.47,1915.76 cw(c2897.16,1915.76) U8.8@2888.9,1924.03
SD_DQ5: JP1.41 U4.44 U8.10 | length 2374.7
  Top Layer w10: JP1.41@2310.72,1957 ccw(c2311.76,1993.77) 2337.76,1967.76 ; JP1.41@2311.28,1977 ccw(c2313.56,2057.61) 2370.58,2000.58 ; JP1.41@2311.56,1986.99 ccw(c2314.46,2089.53) 2387,2017 ; JP1.41@2330.33,1961.87 cw(c2337,1960.1) 2337,1967 ; JP1.41@2330.33,1972.13 ccw(c2337,1973.9) 2337,1967 ; 2354.17,1984.17 cw(c2312.66,2025.69) JP1.41@2311,1967 2337,1967 ; U4.44@3290,2281.55 2997.46,2281.55 2784.92,2069 2519.96,2069 2467.96,2017 2387,2017 ; 2337,1967 2387,2017
  Bottom Layer w10: JP1.41@2311,1967 2364,2020 2430,2020 2482,1968 2482,1868.8 2538.8,1812 2922,1812 2948.47,1838.47 U8.10@2948.47,1950.11 ; JP1.41@2311,1987 ccw(c2311,2035.28) 2345.14,2001.14 ccw(c2379.28,1967) JP1.41@2331,1967 ; U8.10@2945.04,1924.03 cw(c2936.78,1915.76) 2948.47,1915.76 cw(c2960.16,1915.76) U8.10@2951.89,1924.03
SD_DQ6: JP1.42 U4.45 U8.11 | length 1935.3
  Top Layer w10: JP1.42@2411,1967 2442,1967 ; JP1.42@2429.22,1958.76 cw(c2442,1952.98) 2442,1967 ; JP1.42@2429.22,1975.24 ccw(c2442,1981.02) 2442,1967 ; U4.45@3290,2261.86 3001.82,2261.86 2791.96,2052 2527,2052 2442,1967
  Bottom Layer w10: JP1.42@2411,1947 cw(c2411,1898.72) 2445.14,1932.86 cw(c2479.28,1967) JP1.42@2431,1967 ; JP1.42@2411,1967 2465,1913 2465,1861.76 2531.76,1795 2950,1795 2979.96,1824.96 U8.11@2979.96,1950.11 ; U8.11@2976.54,1924.03 cw(c2968.27,1915.76) 2979.96,1915.76 cw(c2991.65,1915.76) U8.11@2983.39,1924.03
SD_DQ7: JP1.43 U4.46 U8.13 | length 2264.5
  Top Layer w10: JP1.43@2311,1867 2364,1920 2435,1920 2550,2035 2799,2035 3006.18,2242.18 U4.46@3290,2242.18 ; JP1.43@2311,1887 ccw(c2311,1935.28) 2345.14,1901.14 ccw(c2379.28,1867) JP1.43@2331,1867
  Bottom Layer w10: JP1.43@2311,1867 2364,1920 2410.33,1920 2448,1882.33 2448,1854.72 2524.72,1778 2973,1778 3042.95,1847.95 U8.13@3042.95,1950.11 ; JP1.43@2311,1887 ccw(c2311,1935.28) 2345.14,1901.14 ccw(c2379.28,1867) JP1.43@2331,1867 ; U8.13@3039.53,1924.03 cw(c3031.26,1915.76) 3042.95,1915.76 cw(c3054.64,1915.76) U8.13@3046.38,1924.03
SD_DQ8: JP4.9 U4.69 U8.42 | length 1459.8
  Top Layer w10: JP4.9@2976,1265 ccw(c2927.72,1265) 2961.86,1299.14 ccw(c2996,1333.28) JP4.9@2996,1285 ; JP4.9@2996,1265 2950,1311 2950,1424.04 3187.96,1662 3479.04,1662 3541.97,1724.93 U4.69@3541.97,1872.1
  Bottom Layer w10: JP4.9@2996,1265 3042.95,1311.95 U8.42@3042.95,1493.42 ; JP4.9@2996,1285 ccw(c2996,1333.28) 3030.14,1299.14 ccw(c3064.28,1265) JP4.9@3016,1265 ; U8.42@3039.53,1467.34 cw(c3031.26,1459.07) 3042.95,1459.07 cw(c3054.64,1459.07) U8.42@3046.38,1467.34
SD_DQ9: JP4.10 U4.70 U8.44 | length 1326.5
  Top Layer w10: JP4.10@2981.86,1379.14 ccw(c2947.72,1413.28) 2996,1413.28 ccw(c3044.28,1413.28) JP4.10@3010.14,1379.14 ; JP4.10@2996,1365 2996,1445.04 3195.96,1645 3486.08,1645 3561.65,1720.57 U4.70@3561.65,1872.1
  Bottom Layer w10: U8.44@2976.54,1467.34 cw(c2968.27,1459.07) 2979.96,1459.07 cw(c2991.65,1459.07) U8.44@2983.39,1467.34 ; 2979.96,1403.72 ccw(c3034.72,1403.72) JP4.10@2996,1365 2979.96,1381.04 U8.44@2979.96,1493.42 ; 2979.96,1427.86 ccw(c3058.86,1427.86) JP4.10@3003.07,1372.07 ; 2979.96,1452 ccw(c3083,1452) JP4.10@3010.14,1379.14
SD_DQ10: JP4.7 U4.65 U8.45 | length 1408.8
  Top Layer w10: JP4.7@2876,1265 ccw(c2827.72,1265) 2861.86,1299.14 ccw(c2896,1333.28) JP4.7@2896,1285 ; JP4.7@2896,1265 2850,1311 2850,1372.12 3173.88,1696 3359,1696 3463.23,1800.23 U4.65@3463.23,1872.1
  Bottom Layer w10: JP4.7@2896,1265 2948.47,1317.47 U8.45@2948.47,1493.42 ; JP4.7@2896,1285 ccw(c2896,1333.28) 2930.14,1299.14 ccw(c2964.28,1265) JP4.7@2916,1265 ; U8.45@2945.04,1467.34 cw(c2936.78,1459.07) 2948.47,1459.07 cw(c2960.16,1459.07) U8.45@2951.89,1467.34
SD_DQ11: JP4.8 U4.68 U8.47 | length 1266.3
  Top Layer w10: JP4.8@2888.84,1383.68 ccw(c2884.86,1394.08) 2896,1394.08 ; JP4.8@2896,1365 2896,1394.08 ; JP4.8@2903.16,1383.68 cw(c2907.14,1394.08) 2896,1394.08 ; U4.68@3522.28,1872.1 3522.28,1729.28 3472,1679 3180.92,1679 2896,1394.08
  Bottom Layer w10: JP4.8@2881.86,1379.14 ccw(c2873.13,1387.87) 2885.47,1387.87 ; U8.47@2882.05,1467.34 cw(c2873.78,1459.07) 2885.47,1459.07 cw(c2897.16,1459.07) U8.47@2888.9,1467.34 ; 2885.47,1390.42 ccw(c2921.42,1390.42) JP4.8@2896,1365 2885.47,1375.53 U8.47@2885.47,1493.42 ; 2885.47,1414.56 ccw(c2945.56,1414.56) JP4.8@2903.07,1372.07 ; 2885.47,1438.7 ccw(c2969.7,1438.7) JP4.8@2910.14,1379.14
SD_DQ12: JP4.5 U4.63 U8.48 | length 1474.7
  Top Layer w10: JP4.5@2776,1265 ccw(c2727.72,1265) 2761.86,1299.14 ccw(c2796,1333.28) JP4.5@2796,1285 ; JP4.5@2796,1265 2750,1311 2750,1386 2852,1488 2917.65,1488 3159.65,1730 3344.92,1730 3423.86,1808.94 U4.63@3423.86,1872.1
  Bottom Layer w10: JP4.5@2796,1265 2853.98,1322.98 U8.48@2853.98,1493.42 ; JP4.5@2796,1285 ccw(c2796,1333.28) 2830.14,1299.14 ccw(c2864.28,1265) JP4.5@2816,1265 ; U8.48@2850.55,1467.34 cw(c2842.29,1459.07) 2853.98,1459.07 cw(c2865.67,1459.07) U8.48@2857.4,1467.34
SD_DQ13: JP4.6 U4.64 U8.50 | length 1230.1
  Top Layer w10: JP4.6@2796,1365 2901.96,1471 2924.69,1471 3166.69,1713 3351.96,1713 3443.54,1804.59 U4.64@3443.54,1872.1 ; JP4.6@2796,1385 ccw(c2796,1433.18) 2830.07,1399.11 ; JP4.6@2816,1365 cw(c2864.38,1365) 2830.17,1399.21
  Bottom Layer w10: JP4.6@2781.86,1379.14 ccw(c2759.83,1401.17) 2790.98,1401.17 ; U8.50@2787.56,1467.34 cw(c2779.29,1459.07) 2790.98,1459.07 cw(c2802.67,1459.07) U8.50@2794.41,1467.34 ; 2790.98,1401.25 ccw(c2832.25,1401.25) JP4.6@2803.07,1372.07 ; 2790.98,1425.39 ccw(c2856.39,1425.39) JP4.6@2810.14,1379.14 ; U8.50@2790.98,1493.42 2790.98,1370.02 JP4.6@2796,1365
SD_DQ14: JP1.49 U4.56 U8.51 | length 2057.6
  Top Layer w10: JP1.49@2311,1567 2366.06,1622.06 2418.38,1622.06 2551.33,1755 2664.96,1755 2694.96,1785 2857.17,1785 2940,1867.83 2940,2030.04 2978.46,2068.5 3199.54,2068.5 3222.72,2045.33 U4.56@3290,2045.33 ; JP1.49@2311,1587 ccw(c2311,1635.28) 2345.14,1601.14 ccw(c2379.28,1567) JP1.49@2331,1567
  Bottom Layer w10: JP1.49@2311,1547 cw(c2311,1498.72) 2345.14,1532.86 cw(c2379.28,1567) JP1.49@2331,1567 ; JP1.49@2311,1567 2360,1518 2374,1504 2522.64,1504 ; 2507,1504 2527,1504 2544,1487 ; 2536,1495 2544,1487 ; U8.51@2756.06,1467.34 cw(c2747.8,1459.07) 2759.49,1459.07 cw(c2771.18,1459.07) U8.51@2762.91,1467.34 ; U8.51@2759.49,1493.42 2759.49,1437.49 2746,1424 2607,1424 2544,1487
SD_DQ15: JP1.50 U4.57 U8.53 | length 1697.3
  Top Layer w10: JP1.50@2411,1567 2582,1738 2672,1738 2702,1768 2864.21,1768 2957,1860.79 2957,2023 2985.5,2051.5 3192.5,2051.5 3218.36,2025.64 U4.57@3290,2025.64 ; JP1.50@2411,1587 ccw(c2411,1635.28) 2445.14,1601.14 ccw(c2479.28,1567) JP1.50@2431,1567
  Bottom Layer w10: JP1.50@2411,1567 2667,1567 2696.5,1537.5 U8.53@2696.5,1493.42 ; JP1.50@2425.14,1552.86 cw(c2459.28,1518.72) 2459.28,1567 cw(c2459.28,1615.28) JP1.50@2425.14,1581.14 ; U8.53@2693.07,1519.5 ccw(c2684.81,1527.77) 2696.5,1527.77 ccw(c2708.19,1527.77) U8.53@2699.92,1519.5
TCK: JTAG.1 R19.2 U4.27 U11.4 | length 1961.7
  Top Layer w10: JTAG.1@2694,2191 2762.67,2191 2972.39,2400.72 U11.4@2972.39,2516.49 ; JTAG.1@2708.14,2176.86 cw(c2742.28,2142.72) 2742.28,2191 cw(c2742.28,2239.28) JTAG.1@2708.14,2205.14 ; v1(3130,2631) 3149,2631 3163.81,2616.19 3205,2616.19 ; v1@3134.95,2626.05 cw(c3146.9,2614.1) 3146.9,2631 cw(c3146.9,2647.9) v1@3134.95,2635.95 ; 3173.81,2616.19 3205,2616.19 ; U4.27@3290,2616.19 3205,2616.19
  Bottom Layer w10: JTAG.1@2694,2191 2700,2197 3017,2197 3105,2285 3105,2430 3113,2438 ; JTAG.1@2701.07,2183.93 cw(c2732.63,2152.37) 2732.63,2197 ; JTAG.1@2708.14,2176.86 cw(c2756.77,2128.23) 2756.77,2197 ; JTAG.1@2708.14,2205.14 ccw(c2727.8,2224.8) 2727.8,2197 ; v1@3125.05,2626.05 cw(c3113.1,2614.1) 3130,2614.1 cw(c3146.9,2614.1) v1@3134.95,2626.05 ; R19.2@3125.9,2446.71 cw(c3113,2451.9) 3113,2438 ; R19.2@3126.68,2429.64 ccw(c3113,2422.64) 3113,2438 ; R19.2@3130,2440 v1(3130,2631) ; 3130,2480.61 ccw(c3182.64,2480.61) R19.2@3145.42,2443.39 ; 3130,2504.75 ccw(c3206.78,2504.75) R19.2@3152.49,2450.46 ; 3130,2528.89 ccw(c3230.92,2528.89) R19.2@3159.56,2457.53 ; R19.2@3145,2438 3113,2438
TDI: JTAG.9 R17.1 U4.26 U11.6 | length 1397
  Top Layer w10: U11.6@2946.8,2699.87 2946.8,2668.2 2979.12,2635.88 3042.88,2635.88 3065,2658 3146.04,2658 3168.17,2635.88 U4.26@3290,2635.88 ; 3025.8,2635.88 ccw(c3025.8,2653.2) v1@3038.05,2640.95 ; 3026.4,2635.88 cw(c3026.4,2619.4) v1@3038.05,2631.05 ; v1@3043,2643 ccw(c3043,2659.9) 3054.95,2647.95 ccw(c3066.9,2636) v1@3050,2636
  Bottom Layer w10: JTAG.9@2694,2571 cw(c2694,2534.79) 2719.61,2560.39 ; JTAG.9@2694,2591 2694,2586 2763.03,2516.97 2763.03,2445 2813.03,2395 2920,2395 2930,2405 ; JTAG.9@2704,2591 ccw(c2740.21,2591) 2714.61,2565.39 ; JTAG.9@2714,2591 ccw(c2774.36,2591) 2731.68,2548.32 ; R17.1@2915.44,2456.53 ccw(c2880.29,2491.68) 2930,2491.68 ccw(c2979.71,2491.68) R17.1@2944.56,2456.53 ; R17.1@2920.93,2419.54 cw(c2913.8,2405) 2930,2405 ; R17.1@2939.07,2419.54 ccw(c2946.2,2405) 2930,2405 ; v1@3038.05,2631.05 ccw(c3026.1,2619.1) 3026.1,2636 ccw(c3026.1,2652.9) v1@3038.05,2640.95 ; v1(3043,2636) 2961,2636 2930,2605 R17.1@2930,2440 2930,2405
TDO: JTAG.3 U4.29 U11.3 | length 1559.2
  Top Layer w10: JTAG.3@2694,2291 2831,2291 2946.8,2406.8 U11.3@2946.8,2516.49 ; JTAG.3@2708.14,2276.86 cw(c2742.28,2242.72) 2742.28,2291 cw(c2742.28,2339.28) JTAG.3@2708.14,2305.14 ; v1@3101.02,2576.82 U4.29@3290,2576.82 ; v1@3101,2576.84 v1(3101,2577) ; v1@3105.95,2572.05 cw(c3117.46,2560.54) 3117.46,2576.82 ; v1@3105.95,2581.95 ccw(c3118.33,2594.33) 3118.33,2576.82
  Bottom Layer w10: JTAG.3@2694,2271 cw(c2694,2222.72) 2728.14,2256.86 cw(c2762.28,2291) JTAG.3@2714,2291 ; JTAG.3@2700,2285 JTAG.3@2694,2291 2769,2216 3011,2216 3085,2290 3085,2561 v1(3101,2577) ; v1@3094,2577 cw(c3077.1,2577) 3089.05,2565.05 cw(c3101,2553.1) v1@3101,2570